# Altium PCB stepDown34063.PcbDoc
Units mil, origin at the board's own origin, x right, y up, seen from the top; angles counter-clockwise.
Board outline 1012.5 x 675 mil, 2 copper layers (Top Layer, Bottom Layer), stack 65.792 mil thick; 12 components, 9 nets, 32 pads, 0 vias.
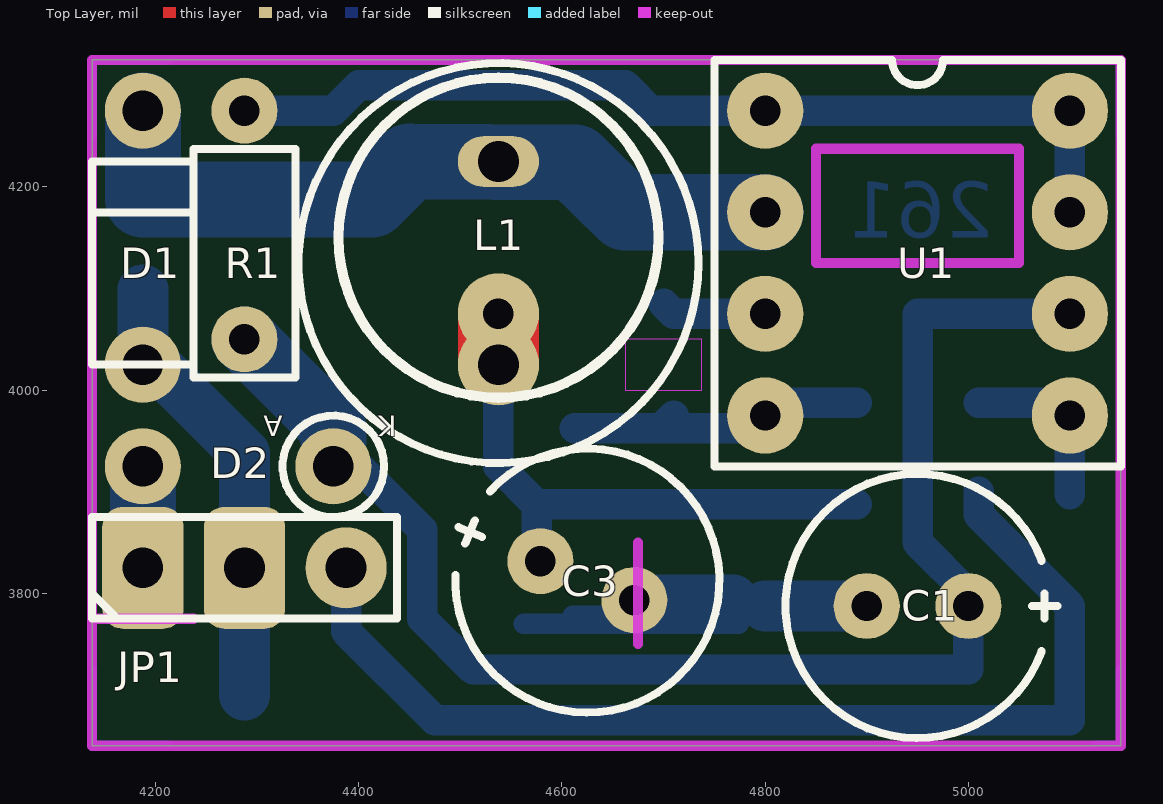
[diagram p0: Top Layer view]
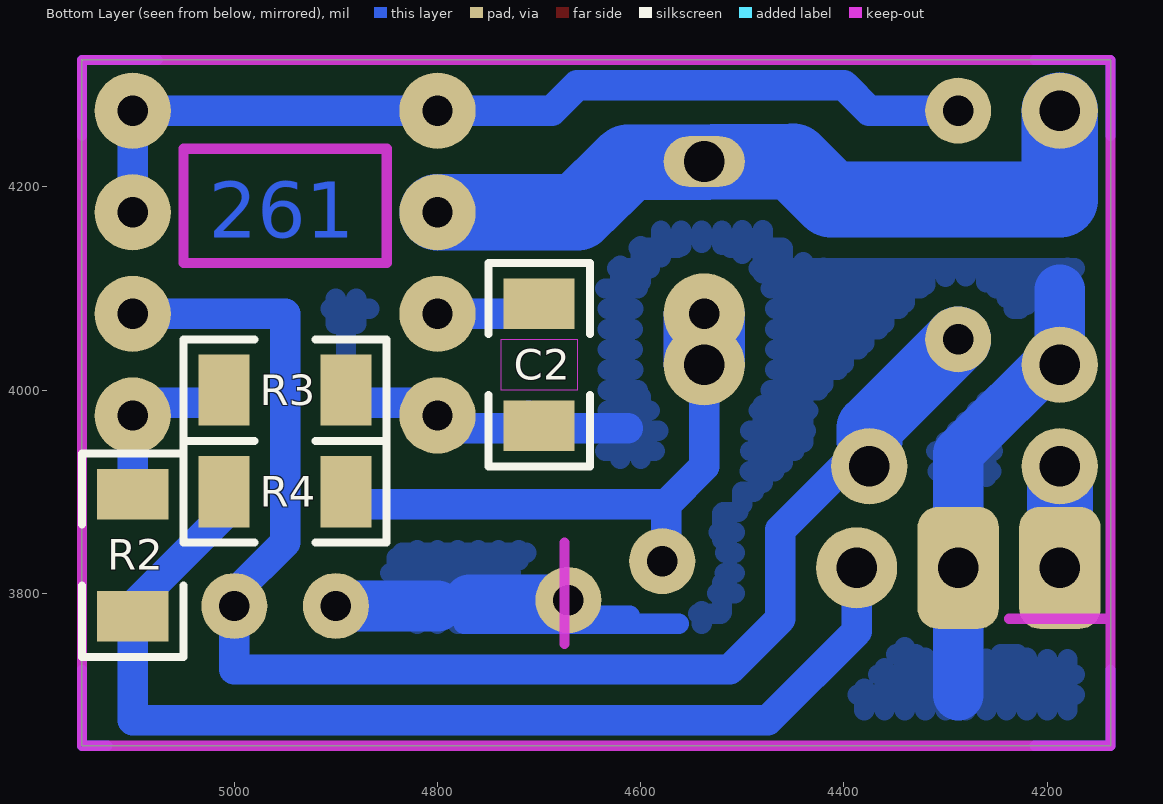
[diagram p1: Bottom Layer view, seen from below]
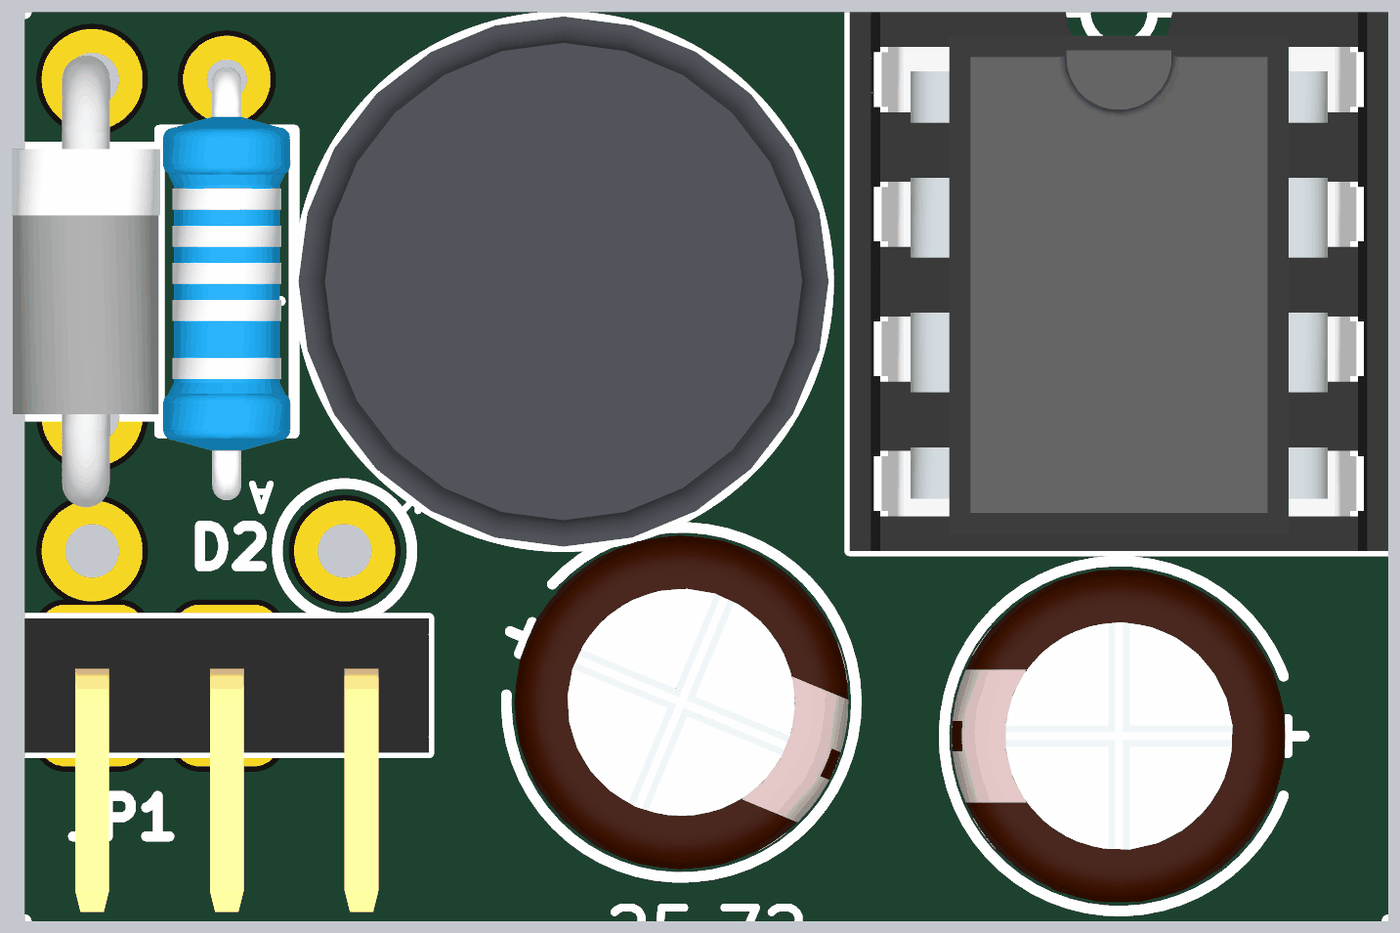
[diagram p2: 3D render of the assembled board from above, using the file's embedded part models]
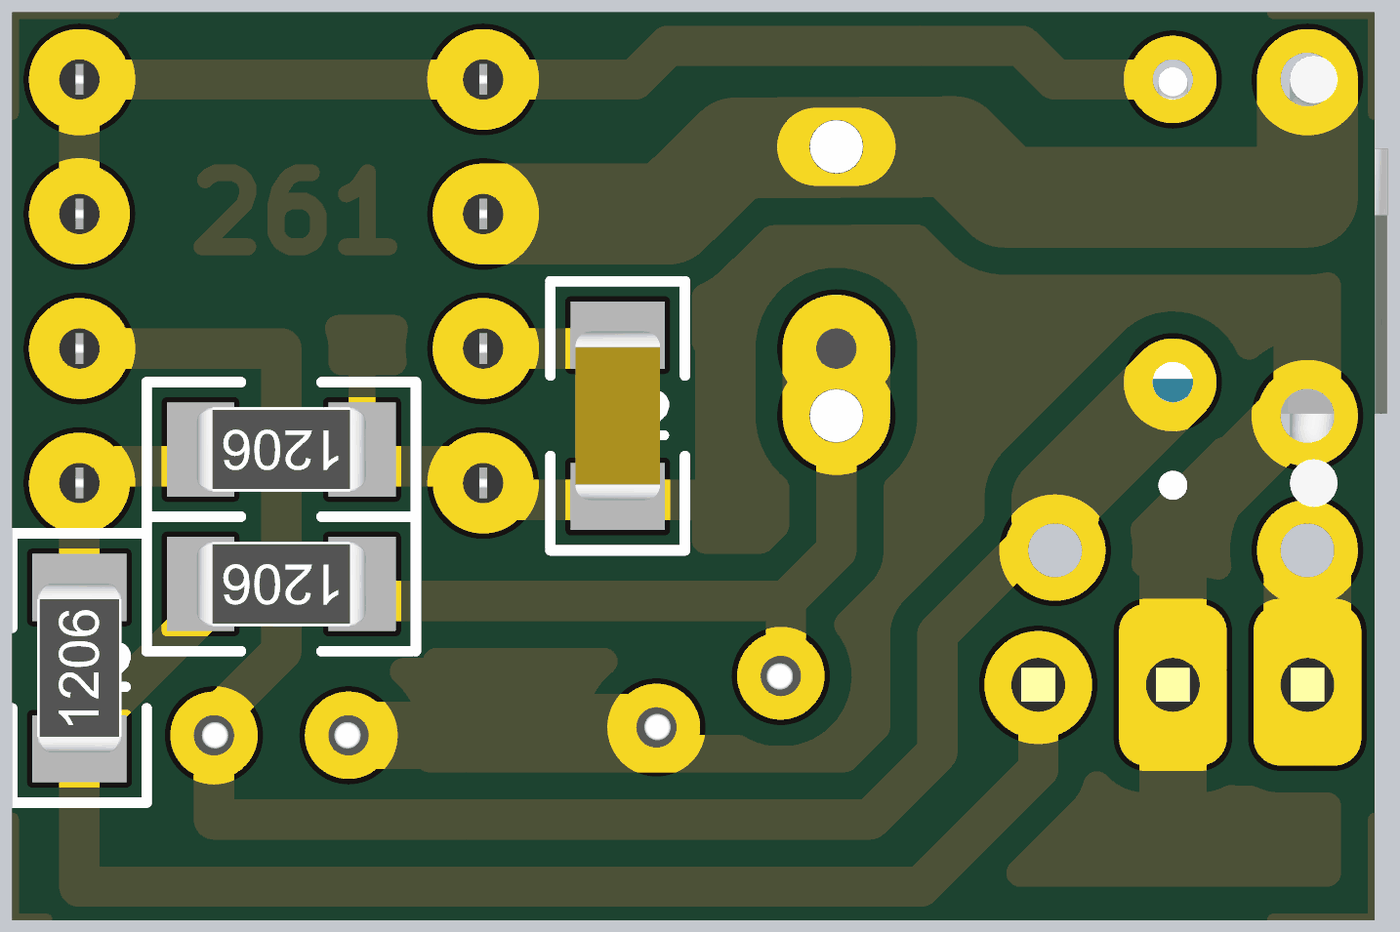
[diagram p3: 3D render of the assembled board from below, using the file's embedded part models]

## Layer stack, top to bottom
Top Layer: signal copper 1.4
Dielectric: core 62.9921, FR-4, Dk 4.8
Bottom Layer: signal copper 1.4

## Board outline
4137.5,3650 5150,3650 5150,4325 4137.5,4325

## Design rules (kind name [scope] priority, off if disabled: settings)
Clearance [All] p1: gap=20
PolygonConnect [All] p1: connectstyle=Relief reliefconductorwidth=20 reliefentries=4 polygonreliefangle="90 Angle"
RoutingVias [All] p1: holewidth=28 width=50 viastyle="Through Hole" minholewidth=28 minwidth=50 maxholewidth=28 maxwidth=50
SilkscreenOverComponentPads [All] p1: minsilkscreentomaskgap=10
SolderMaskExpansion [All] p1: expansion=4
Width [All] p1: maxlimit=1000 minlimit=10 preferedwidth=15
27 further rules are at their usual default settings.

## Components (designator, comment, footprint, x,y, rotation, side; value= is the part's Value field where it differs from the comment)
C1 "Cap Pol" C_EL_6-3X11 4950,3787.5 r180 top
C2 "Cap" c1206 4700,4025 r90 bottom
C3 "Cap Pol" C_EL_6-3X11 4625,3812.5 r337.5 top
D1 "1N5819" DIODE300_1MM 4187.5,4125 r90 top
D2 "1N4007" diode300_90B 4375,3925 r180 top
JP1 "Header3x1" HDR3x1_90_REVES 4187.5,3825 r0 top
L1 "Inductor" L_10X12 4537.5,4125 r270 top
R1 "Resistencia 1W; 100Kohm" RES300TH 4287.5,4125 r270 top
R2 "Resistencia 1206; 1Kohm" R1206 5100,3837.5 r90 bottom
R3 "Resistencia 1206; 1Kohm" R1206 4950,4000 r0 bottom
R4 "Resistencia 1206; 0ohm" R1206 4950,3900 r0 bottom (schematic designator R2)
U1 "MC34063" dip8z 4800,4275 r0 top

## Footprints (in the part's own frame and the unit in brackets; to place one, negate y for a bottom-side part, rotate by r counter-clockwise, add the part's x,y. Pads: shape width x height; smd on the part's side, far side on the other; paste and mask are expansions set on the pad)
c1206 [mil]
  rect 50x70 smd: 1(-60,0) 2(60,0)
  silkscreen extent -100,-50 100,50, body extent -63,-31 63,31, height 33
C_EL_6-3X11 [mil] "C_EL_6-3X11"
  round 65 hole 30: 1(-50,0) 2(50,0)
  silkscreen extent -138,-130 130,130, body extent -124,-124 124,124, height 433
DIODE300_1MM [mil]
  round 75 hole 40: 1(-100,0) 2(150,0)
  silkscreen extent -100,-50 100,50, body extent -168,-50 168,60, height 122
diode300_90B [mil]
  round 75 hole 40: 1(187.5,0) 2(0,0)
  silkscreen extent -50,-50 50,50
dip8z [mil] "ZOCALO DIP 8"
  round 75 hole 30: 1(0,0) 2(0,-100) 3(0,-200) 4(0,-300) 5(300,-300) 6(300,-200) 7(300,-100) 8(300,0)
  silkscreen extent -50,-350 350,50, body extent -50,-350 350,50, height 311
HDR3x1_90_REVES [mil]
  rrect50% 80x120 hole 40: 1(0,0) 2(100,0)
  round 80 hole 40: 3(200,0)
  silkscreen extent -50,-50 250,50, body extent -50,-168 250,50, height 171
L_10X12 [mil] "L_10X12"
  oval 50x80 hole 40: 1(-100,0)
  round 80 hole 40: 2(100,0)
  silkscreen extent -197,-197 197,197, body extent -197,-197 197,197, height 471
R1206 [mil]
  rect 50x70 smd: 1(-60,0) 2(60,0)
  silkscreen extent -100,-50 100,50, body extent -63,-31 63,31, height 34
RES300TH [mil] "RESISTENCIA THROUGH-HOLE"
  round 65 hole 30: 1(-150,0) 2(75,0)
  silkscreen extent -113,-50 113,50, body extent -159,-47 162,47, height 98

## Part data
C1 C3: "Capacitor Polarizado"
C2: "Capacitor"
D1: "Schottky Diode 1A 40V"
JP1: "Header 3x1"
U1: "DC-to-DC Converter Control Circuit"

## Free pads (board coordinates)
  round 80 hole 30: 0(4537.5,4075)

## Nets (pads, with @x,y where several pads share a name; then routed paths per layer and width w, separated by ;. In a path a pad name is that pad's centre, name@x,y a point inside that pad or via, vN(x,y) a via of type N, cw(c..) or ccw(c..) an arc to the next point about the centre after c; other vN are vias at no path point)
GND: C1.2 C2.1 C3.2 D1.1 JP1.2 R3.1 U1.4 | length 1310.3
  Bottom Layer w20: 4562.5,3770 4613.23,3770 ; 4610.65,3777.85 4613.23,3777.85 ; 4760,3777.85 4613.23,3777.85 ; 4774.06,3770 4613.23,3770 ; 4613.23,3770 4613.23,3777.85
  Bottom Layer w30: 4612.5,3962.5 U1.4@4800,3962.5 ; C2.1 C2.1@4710,3975 ; U1.4@4800,3987.5 R3.1@4890,3987.5
  Bottom Layer w50: 4187.5,4098.75 4187.5,4037.5 4287.5,3937.5 JP1.2@4287.5,3812.5 ; 4287.5,3700 JP1.2 ; C3.2 4768.37,3793.37 ; 4800,3787.5 C1.2
NetC2_2: C2.2 U1.3 | length 104.1
  Bottom Layer w30: C2.2 4710,4075 U1.3
NetC3_1: C3.1 L1.2 pad.0 R4.1 | length 518
  Bottom Layer w30: L1.2@4537.5,4012.5 4537.5,3925 4575,3887.5 ; C3.1@4575,3825 4575,3887.5 ; R4.1@4890,3887.5 4575,3887.5
NetD1_2: D1.2 L1.1 U1.2 | length 735.6
  Bottom Layer w75: D1.2 4187.5,4187.5 4412.5,4187.5 4450,4225 4612.5,4224.04 4662.5,4175 U1.2
NetR1_1: R1.1 U1.1 U1.7 U1.8 | length 933.2
  Bottom Layer w30: R1.1 4375,4275 4400,4300 4662.5,4300 4687.5,4275 U1.1 U1.8 U1.7
NetR2_2: R2.2 R3.2 U1.5 | length 180
  Bottom Layer w30: R3.2@5010,3987.5 5100,3987.5 R2.2
VD: C1.1 D2.2 R1.2 U1.6 | length 1451.4
  Bottom Layer w30: D2.2 4375,3950 4462.5,3862.5 4462.5,3775 4512.5,3725 5000,3725 C1.1 5000,3800 4950,3850 4950,4075 U1.6
  Bottom Layer w65: R1.2 4375,3962.5 D2.2@4375,3950
VIN: D2.1 JP1.1 | length 112.5
  Bottom Layer w65: JP1.1@4187.5,3812.5 D2.1
VOUT: JP1.3 R2.1 R4.2 | length 1071
  Bottom Layer w30: JP1.3 4387.5,3762.5 4475,3675 5100,3675 R2.1@5100,3775 ; R4.2 5010,3877.5 5100,3787.5 R2.1
copper on no net: | length 550
  Bottom Layer w10: 4137.5,3725 4137.5,3650 4212.5,3650 ; 4137.5,4250 4137.5,4325 4212.5,4325 ; 5075,4325 5150,4325 5150,4250 ; 5125,3650 5150,3650 5150,3725

## Polygon pours and split planes (outlines as drawn)
GND on Bottom Layer "Bottom Layer-No Net" (hatched 90Degree grid 20 track 20, remove dead copper, pour order 2): 5150,3650 5150,4350 4137.5,4350 4137.5,3650 5150,3650

## Keep-outs
Keep-Out Layer:
  rectangle: 4662.5,4000 4737.5,4050
  lines w10: 4137.5,3775 4237.5,3775 ; 4675,3750 4675,3850 ; 4137.5,3650 4137.5,4325 5150,4325 5150,3650 4137.5,3650 ; 4850,4125 4850,4237.5 5050,4237.5 5050,4125 4850,4125

## Other copper
Bottom Layer:
  text "261" at 5025,4150 h55
Multi-Layer:
  lines w30 net NetC3_1: 4512.5,4025 4512.5,4075 ; 4562.5,4025 4562.5,4075

## Silkscreen, mask and mechanical layers (free items; w line width, h text height)
Top Overlay:
  circle w10: c4537.5,4150 r157.48
Mechanical 1:
  text "Version 3 digitos = XXY" at 5225,4550 h50
  text "-- XX = ano AABB = 2026 => XX = 26" at 5225,4475 h50
  text "-- Y = mes en hexadecimal = diciembre => Y = C" at 5225,4400 h50

## Dimensions
4537.5,4225 to 4537.5,4075 on Mechanical 1
4137.5,3650 to 5150,3650 on Top Overlay
4137.5,3650 to 4137.5,4325 on Top Overlay

## Text inside footprints (layer, text, board x,y; h text height)
D2: Top Overlay "A" at 4325,3975 h20 r180; Top Overlay "K" at 4437.5,3975 h20 r180